# Altium PCB PCB1.PcbDoc
Units mil, origin at the board's own origin, x right, y up, seen from the top; angles counter-clockwise.
Board outline 1610.03 x 1610.03 mil, 2 copper layers (Top Layer, Bottom Layer); 99 components, 70 nets, 276 pads, 102 vias.
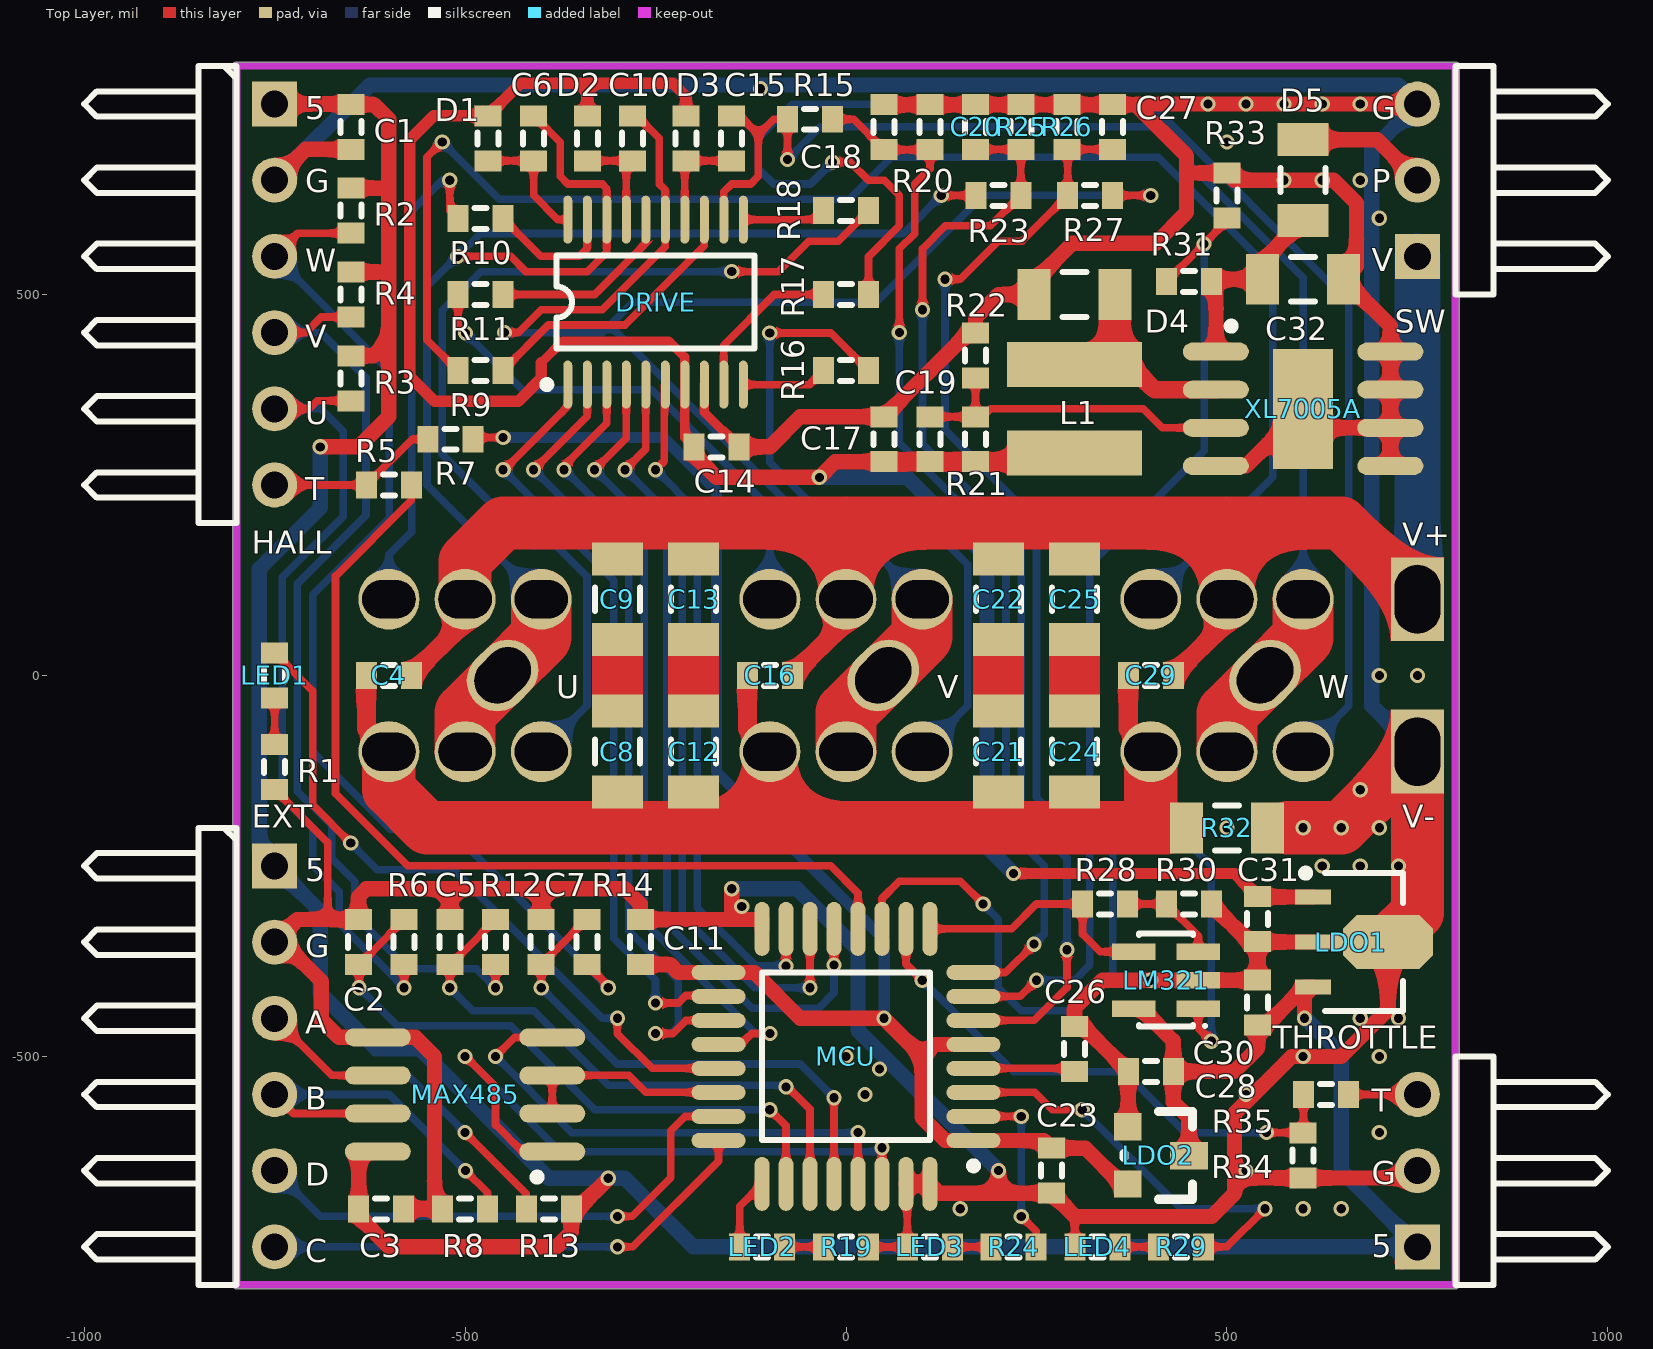
[diagram p0: Top Layer view]
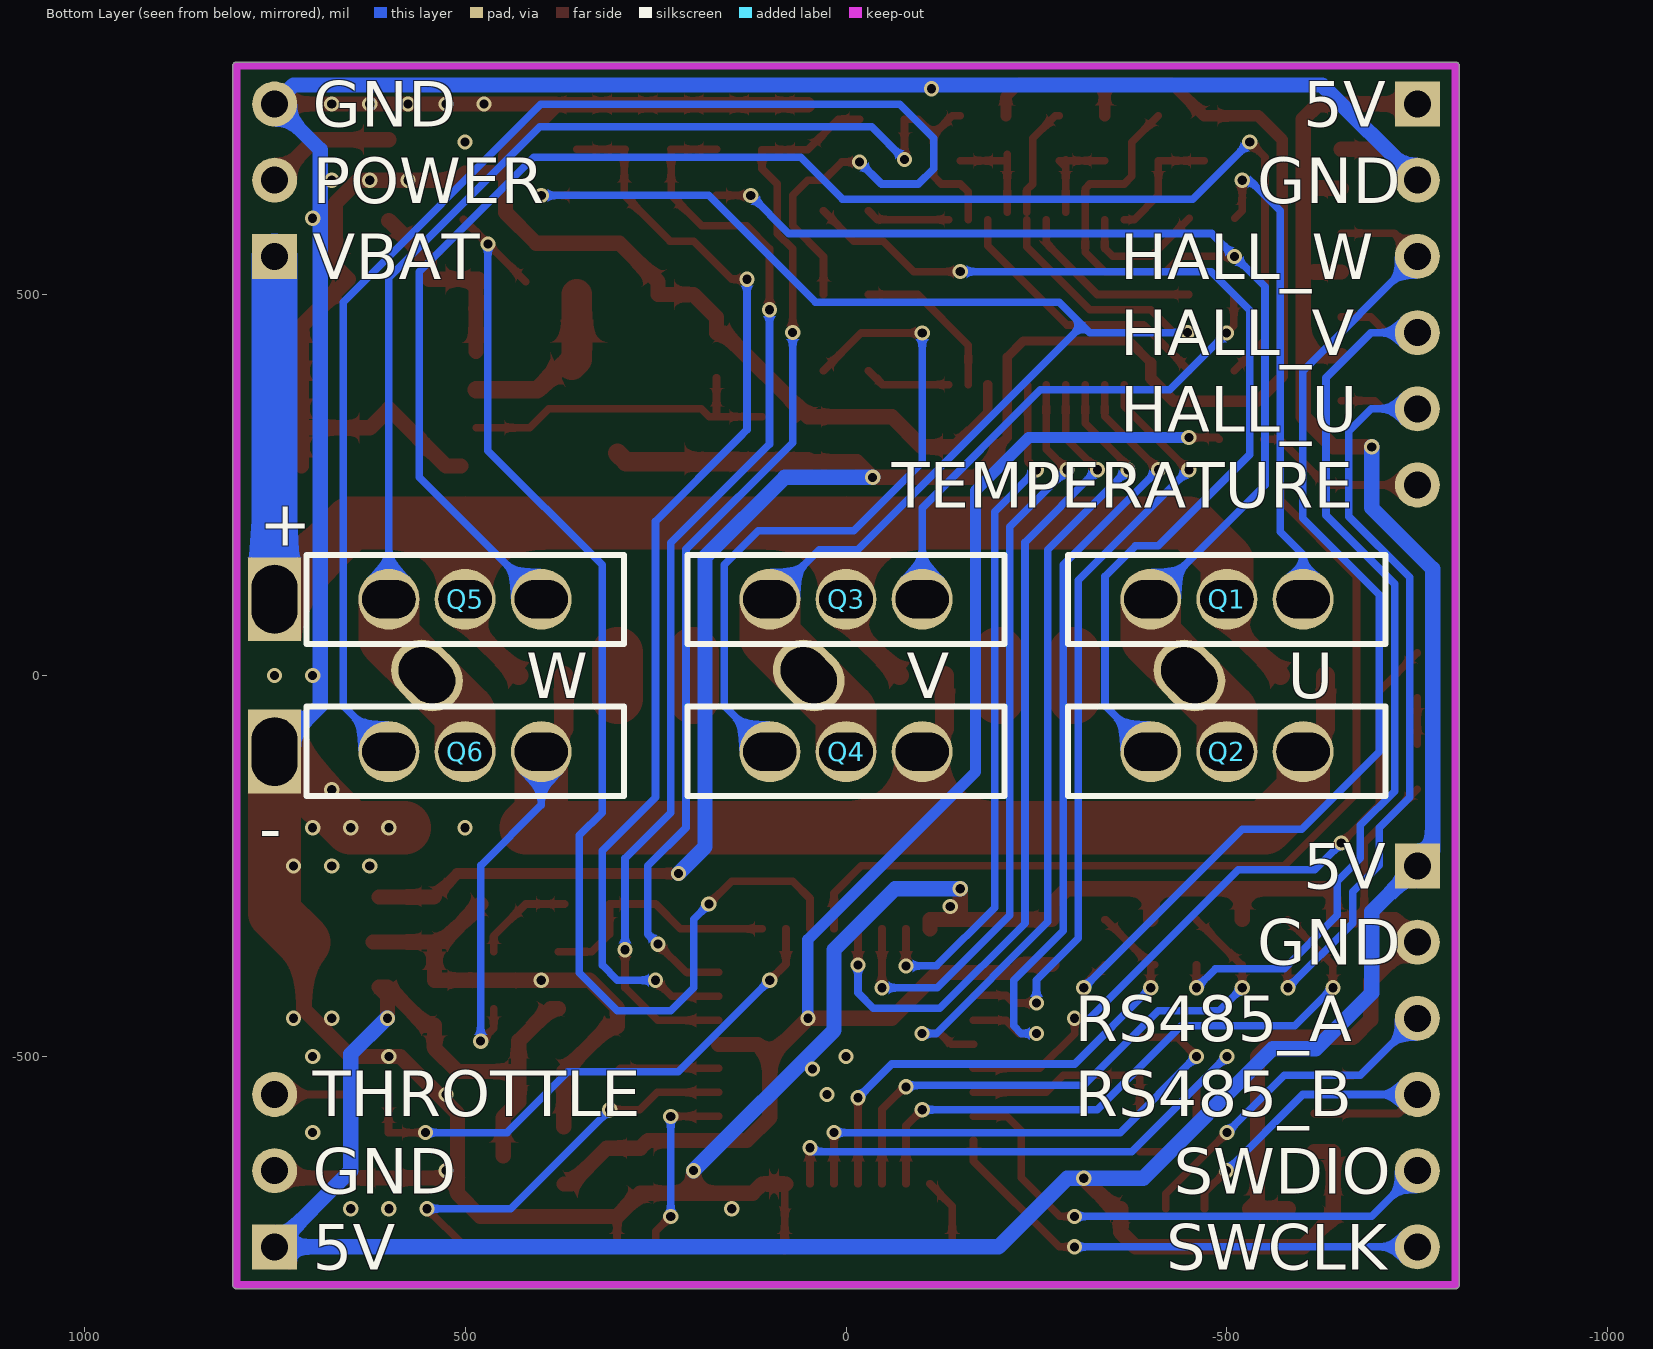
[diagram p1: Bottom Layer view, seen from below]

## Layer stack, top to bottom
Top Solder: solder mask 0.4, Solder Resist, Dk 3.5
Top Layer: signal copper 1.4
Dielectric 1: dielectric 12.6, FR-4, Dk 4.8
Bottom Layer: signal copper 1.4
Bottom Solder: solder mask 0.4, Solder Resist, Dk 3.5

## Board outline
-805.01,-800 ccw(c-800,-800) -800,-805.02 800,-805.02 ccw(c800,-800) 805.01,-800 805.01,800 ccw(c800,800) 800,805.01 -800,805.01 ccw(c-800,800) -805.01,800

## Design rules (kind name [scope] priority, off if disabled: settings)
Clearance [All] p1: gap=10 ignorepadtopadclearanceinfootprint=FALSE except(0: Arc-Hole Track-Hole SMDPad-Hole THPad-Hole Via-Hole Fill-Hole Poly-Hole Region-Hole Text-Hole)
PlaneConnect [All] p1: planeconnectstyle=Direct reliefexpansion=20 reliefentries=4 reliefconductorwidth=10 reliefairgap=10
PolygonConnect [All] p1: connectstyle=Direct reliefconductorwidth=10 reliefentries=4 polygonreliefangle="90 Angle" airgapwidth=10
RoutingVias [All] p1: holewidth=12 width=20 viastyle="Through Hole" minholewidth=12 minwidth=20 maxholewidth=393.7 maxwidth=393.7
SolderMaskExpansion [All] p1: expansion=4
Width [All] p1: maxlimit=100 minlimit=10 preferedwidth=10 minimp=50.000000 maximp=50.000000 favimp=50.000000
29 further rules are at their usual default settings.

## Components (designator, comment, footprint, x,y, rotation, side; value= is the part's Value field where it differs from the comment)
C1 "Cap" 0603 -650,720 r270 top value=1uF (schematic designator C45)
C2 "Cap" 0603 -640,-350 r90 top value=104 (schematic designator C61)
C3 "Cap" 0603 -610,-700 r0 top value=1uF (schematic designator C46)
C4 "Cap" 0603 -600,0 r180 top value=1uF (schematic designator C50)
C5 "Cap" 0603 -520,-350 r90 top value=104 (schematic designator C62)
C6 "Cap" 0603 -410,705 r270 top value=1uF (schematic designator C1)
C7 "Cap" 0603 -400,-350 r90 top value=104 (schematic designator C63)
C8 "Cap" 1206 -300,-100 r270 top value=1uF (schematic designator C57)
C9 "Cap" 1206 -300,100 r270 top value=1uF (schematic designator C58)
C10 "Cap" 0603 -280,705 r270 top value=1uF (schematic designator C2)
C11 "Cap" 0603 -270,-350 r90 top value=0.1uf (schematic designator C16)
C12 "Cap" 1206 -200,-100 r270 top value=1uF (schematic designator C55)
C13 "Cap" 1206 -200,100 r270 top value=1uF (schematic designator C56)
C14 "Cap" 0603 -170,300 r180 top value=1uf (schematic designator C66)
C15 "Cap" 0603 -150,705 r270 top value=1uF (schematic designator C3)
C16 "Cap" 0603 -100,0 r180 top value=1uF (schematic designator C60)
C17 "Cap" 0603 50,310 r90 top value=33nf (schematic designator C11)
C18 "Cap" 0603 50,719.53 r270 top value=10nf (schematic designator C43)
C19 "Cap" 0603 110,310 r90 top value=33nf (schematic designator C13)
C20 "Cap" 0603 170,720 r270 top value=10nf (schematic designator C42)
C21 "Cap" 1206 200,-100 r270 top value=1uF (schematic designator C51)
C22 "Cap" 1206 200,100 r270 top value=1uF (schematic designator C53)
C23 "Cap" 0603 270,-650 r270 top value=0.1uf (schematic designator C17)
C24 "Cap" 1206 300,-100 r270 top value=1uF (schematic designator C52)
C25 "Cap" 1206 300,100 r270 top value=1uF (schematic designator C54)
C26 "Cap" 0603 300,-490 r270 top value=0.1uf (schematic designator C5)
C27 "Cap" 0603 350,720 r270 top value=10nf (schematic designator C41)
C28 "Cap" 0603 400,-520 r180 top value=0.1uf (schematic designator C15)
C29 "Cap" 0603 400,0 r180 top value=1uF (schematic designator C59)
C30 "Cap" 0603 540,-429.53 r90 top value=1uF (schematic designator C40)
C31 "Cap" 0603 540,-319.53 r270 top value=0.1uf (schematic designator C14)
C32 "Cap" 1206 600,520 r0 top value=0.1uf (schematic designator C12)
D1 "Diode" 0603 -470,705 r270 top
D2 "Diode" 0603 -339.57,705 r270 top
D3 "Diode" 0603 -210,705 r270 top
D4 "Diode" 1206 300,500 r0 top
D5 "Fuse 1" 1206 600,650 r90 top (schematic designator D8)
DRIVE "FD6288" TSSOP20 -250,490 r0 top
EXT "Header 6H" HDR1X6H -750,-250 r270 top
HALL "Header 6H" HDR1X6H -750,750 r270 top
L1 "Inductor" CDRH3D16 300,350 r270 top value=47uH
LDO1 "78L05" SOT-89 680,-350 r0 top
LDO2 "XC6206" SOT23 410,-630 r270 top
LED1 "LED0" 0603 -750,0 r270 top (schematic designator LED4)
LED2 "LED0" 0603 -110,-750 r0 top (schematic designator LED3)
LED3 "LED0" 0603 110,-750 r180 top (schematic designator LED1)
LED4 "LED0" 0603 330,-750 r180 top (schematic designator LED2)
LM321 "LM321" SOT23-5 420,-400 r90 top
MAX485 "MAX485" SOIC-8 -500,-550 r180 top
MCU "STM32F030K6Tx" LQFP-32 0,-500 r180 top
Q1 "MOSFET-N" TO220-MIX -500,100 r0 bottom
Q2 "MOSFET-N" TO220-MIX -500,-100 r180 bottom
Q3 "MOSFET-N" TO220-MIX 0,100 r0 bottom
Q4 "MOSFET-N" TO220-MIX 0,-100 r180 bottom
Q5 "MOSFET-N" TO220-MIX 500,100 r0 bottom
Q6 "MOSFET-N" TO220-MIX 500,-100 r180 bottom
R1 "Res1" 0603 -750,-120 r270 top value=1K (schematic designator R92)
R2 "Res1" 0603 -650,610 r270 top value=1K (schematic designator R69)
R3 "Res1" 0603 -650,390 r270 top value=1K (schematic designator R67)
R4 "Res1" 0603 -650,500 r270 top value=1K (schematic designator R68)
R5 "Res1" 0603 -600,250 r0 top value=100 (schematic designator R71)
R6 "Res1" 0603 -580,-350 r90 top value=100 (schematic designator R64)
R7 "Res1" 0603 -519.06,310 r180 top value=1K (schematic designator R70)
R8 "Res1" 0603 -500,-700 r0 top value=20K (schematic designator R81)
R9 "Res1" 0603 -480,400 r0 top value=3R3 (schematic designator R3)
R10 "Res1" 0603 -480,600 r0 top value=3R3 (schematic designator R1)
R11 "Res1" 0603 -479.53,500 r0 top value=3R3 (schematic designator R2)
R12 "Res1" 0603 -460,-350 r90 top value=100 (schematic designator R65)
R13 "Res1" 0603 -390,-700 r180 top value=20K (schematic designator R80)
R14 "Res1" 0603 -340,-350 r90 top value=100 (schematic designator R66)
R15 "Res1" 0603 -47.24,730 r0 top value=56k (schematic designator R28)
R16 "Res1" 0603 0,400 r180 top value=3R3 (schematic designator R8)
R17 "Res1" 0603 0,500 r180 top value=3R3 (schematic designator R9)
R18 "Res1" 0603 0,610 r180 top value=3R3 (schematic designator R7)
R19 "Res1" 0603 0,-750 r0 top value=1K (schematic designator R89)
R20 "Res1" 0603 110.24,719.53 r90 top value=4K7 (schematic designator R29)
R21 "Res1" 0603 170,310 r90 top value=30K (schematic designator R32)
R22 "Res1" 0603 170,420 r90 top value=2.7K (schematic designator R31)
R23 "Res1" 0603 200,630 r0 top value=56k (schematic designator R22)
R24 "Res1" 0603 220,-750 r180 top value=1K (schematic designator R90)
R25 "Res1" 0603 230,720 r90 top value=4K7 (schematic designator R23)
R26 "Res1" 0603 290,720 r90 top value=4K7 (schematic designator R25)
R27 "Res1" 0603 320.47,630 r180 top value=56k (schematic designator R24)
R28 "Res1" 0603 340,-300 r180 top value=100K (schematic designator R27)
R29 "Res1" 0603 440,-750 r180 top value=1K (schematic designator R91)
R30 "Res1" 0603 450,-300 r180 top value=10K (schematic designator R26)
R31 "Res1" 0603 450,516.85 r180 top value=300K (schematic designator R14)
R32 "Res1" 1206 500,-200 r0 top value=0.01 (schematic designator R13)
R33 "Res1" 0603 500,630 r90 top value=10K (schematic designator R15)
R34 "Res1" 0603 600,-630 r270 top value=10K (schematic designator R36)
R35 "Res1" 0603 630,-550 r180 top value=10K
SW "Header 3H" HDR1X3H 750,550 r90 top
THROTTLE "Header 3H" HDR1X3H 750,-750 r90 top
U "TPS50mil" PHASE#1 -450.71,0 r90 top
V "TPS50mil" PHASE#1 48.9,0 r90 top
V+ "TPS50mil" PHASE#2 750,100 r0 top
V- "TPS50mil" PHASE#2 750,-100 r0 top
W "TPS50mil" PHASE#1 550,0 r90 top
XL7005A "XL7005A" SOIC-8P 600,350 r0 top

## Footprints (in the part's own frame and the unit in brackets; to place one, negate y for a bottom-side part, rotate by r counter-clockwise, add the part's x,y. Pads: shape width x height; smd on the part's side, far side on the other; paste and mask are expansions set on the pad)
0603 [mm] "Chip Resistor, Body 1.6x0.8mm, IPC High Density"
  rect 0.7x0.9 smd: 1(-0.75,0) 2(0.75,0)
  silkscreen extent -0.2,-0.35 0.2,0.35, body extent -0.85,-0.48 0.85,0.48, height 0.9
1206 [mm] "Chip Capacitor, Body 3.2x1.6mm, IPC High Density"
  rect 1.1x1.7 smd: 1(-1.35,0) 2(1.35,0)
  silkscreen extent -0.4,-0.75 0.4,0.75, body extent -1.7,-0.9 1.7,0.9, height 1.3
CDRH3D16 [mm] "Molded Inductor, 2-Leads, Body 4.00x4.00mm, IPC Medium Density"
  rect 1.5x4.5 smd: 1(-1.475,0) 2(1.475,0)
  body extent -2,-2 2,2, height 2
HDR1X3H [mm] "Connector; Header; 3 Position; Right Angle"
  rect 1.5x1.5 hole 0.9: 1(0,0)
  round 1.5 hole 0.9: 2(2.54,0) 3(5.08,0)
  silkscreen extent -1.27,-6.35 6.35,-1.27
HDR1X6H [mm] "Connector; Header; 6 Position; Right Angle"
  rect 1.5x1.5 hole 0.9: 1(0,0)
  round 1.5 hole 0.9: 2(2.54,0) 3(5.08,0) 4(7.62,0) 5(10.16,0) 6(12.7,0)
  silkscreen extent -1.27,-6.35 13.97,-1.27
LQFP-32 [mm] "LQFP"
  oval 1.8x0.5 smd: 1(-4.25,2.8) 2(-4.25,2) 3(-4.25,1.2) 4(-4.25,0.4) 5(-4.25,-0.4) 6(-4.25,-1.2) 7(-4.25,-2) 8(-4.25,-2.8) 17(4.25,-2.8) 18(4.25,-2) 19(4.25,-1.2) 20(4.25,-0.4) 21(4.25,0.4) 22(4.25,1.2) 23(4.25,2) 24(4.25,2.8)
  oval 0.5x1.8 smd: 9(-2.8,-4.25) 10(-2,-4.25) 11(-1.2,-4.25) 12(-0.4,-4.25) 13(0.4,-4.25) 14(1.2,-4.25) 15(2,-4.25) 16(2.8,-4.25) 25(2.8,4.25) 26(2,4.25) 27(1.2,4.25) 28(0.4,4.25) 29(-0.4,4.25) 30(-1.2,4.25) 31(-2,4.25) 32(-2.8,4.25)
  silkscreen extent -4.38,-2.79 2.79,3.77, body extent -3.5,-3.5 3.5,3.5, height 1.6
PHASE#1 [mil]
  oval 100x80 hole 60 slot 80 at 135 deg rot 135: 1(0,0)
PHASE#2 [mil]
  rect 70x110 hole 60 slot 90 at 90 deg: 1(0,0)
SOIC-8 [mm]
  oval 2.2x0.6 smd: 1(-2.908,1.905) 2(-2.908,0.635) 3(-2.908,-0.635) 4(-2.908,-1.905) 5(2.908,-1.905) 6(2.908,-0.635) 7(2.908,0.635) 8(2.908,1.905)
  silkscreen extent -2.53,2.63 -2.28,2.88
SOIC-8P [mm]
  oval 2.2x0.6 smd: 1(-2.908,1.905) 2(-2.908,0.635) 3(-2.908,-0.635) 4(-2.908,-1.905) 5(2.908,-1.905) 6(2.908,-0.635) 7(2.908,0.635) 8(2.908,1.905)
  rect 2x4 smd: 9(0,0)
  silkscreen extent -2.52,2.63 -2.27,2.88
SOT23 [mil]
  rect 36x36 smd: 1(-37.5,-40) 3(37.5,-40)
  rect 36x50 smd: 2(0.5,40)
  silkscreen extent -58,-45 58,45
SOT23-5 [mm] "SOT-23/SC-74A; 5 Leads; Body 3.1 x 3 mm, inc. leads (LxW max)"
  rect 0.55x1.45 smd: 1(-0.95,-1.075) 2(0,-1.075) 3(0.95,-1.075) 4(0.95,1.075) 5(-0.95,1.075)
  silkscreen extent -1.57,-1.35 1.55,0.9
SOT-89 [mm] "SOT89, 3-Leads, Body 4.5x2.4 mm, Pitch 1.5mm, Lead Span 4.1mm, IPC High Density"
  rect 1.2x0.5 smd: 1(-1.7,1.5) 3(-1.7,-1.5)
  rect 1.6x0.5 smd: 2(-1.5,0)
  oct 3x1.8 smd: 2(0.8,0)
  silkscreen extent -2.07,-2.3 1.3,2.42, body extent -1.3,-2.3 1.3,2.3, height 1.6
TO220-MIX [mil]
  round 80 hole 50 slot 70 at 0 deg: 1(-100,0) 2(0,0) 3(100,0)
  silkscreen extent -208,-58 208,59
TSSOP20 [mm] "Shrink Small Outline; 20 Leads; Body Width 4.4 mm; Pitch 0.65 mm"
  oval 0.3x1.6 smd: 1(-2.925,-2.75) 2(-2.275,-2.75) 3(-1.625,-2.75) 4(-0.975,-2.75) 5(-0.325,-2.75) 6(0.325,-2.75) 7(0.975,-2.75) 8(1.625,-2.75) 9(2.275,-2.75) 10(2.925,-2.75) 11(2.925,2.75) 12(2.275,2.75) 13(1.625,2.75) 14(0.975,2.75) 15(0.325,2.75) 16(-0.325,2.75) 17(-0.975,2.75) 18(-1.625,2.75) 19(-2.275,2.75) 20(-2.925,2.75)
  silkscreen extent -3.75,-2.87 3.3,1.55, body extent -3.3,-1.91 3.3,1.91, height 1.1

## Part data
C1 C2 C3 C4 C5 C6 C7 C8 C9 C10 C11 C12 C13 C14 C15 C16 C17 C18 C19 C20 C21 C22 C23 C24 C25 C26 C27 C28 C29 C30 C31 C32: "Capacitor", LatestRevisionDate=17-Jul-2002, LatestRevisionNote="Re-released for DXP Platform.", PackageDescription="Radial Cap, Thru-Hole; 2 Leads; 0.3 in Pin Spacing", PackageReference=RAD-0.3, Published=8-Jun-2000, Publisher="Altium Limited"
D1 D2 D3 D4: "Default Diode", Code_JEDEC=DO-214-AB, LatestRevisionDate=17-Jul-2002, LatestRevisionNote="Re-released for DXP Platform.", PackageDescription="DO-214-AB/SMC; 2 C-Bend Leads; Body 7.9 x 5.9 mm, inc. leads (LxW)", PackageReference=SMC, PackageVersion=Sep-1996, Published=8-Jun-2000, Publisher="Altium Limited"
D5: "Fuse", LatestRevisionDate=17-Jul-2002, LatestRevisionNote="Re-released for DXP Platform.", PackageDescription="Thru-Hole; 2 Leads", PackageReference=PIN-W2/E2.8, Published=8-Jun-2000, Publisher="Altium Limited"
EXT HALL: "Header, 6-Pin, Right Angle", LatestRevisionDate=17-Jul-2002, LatestRevisionNote="Re-released for DXP Platform.", Publisher="Altium Limited"
LDO2: library part HT75xx
LED1 LED2 LED3 LED4: "Typical INFRARED GaAs LED", LatestRevisionDate=08-Jul-2005, LatestRevisionNote="Mech Layer 1 removed.", PackageDescription="LED; 2 Leads", PackageReference=LED-0, Published=8-Jun-2000, Publisher="Altium Limited"
MAX485: library part SP3485
Q1 Q2 Q3 Q4 Q5 Q6: "N-Channel MOSFET", LatestRevisionDate=17-Jul-2002, LatestRevisionNote="Re-released for DXP Platform.", PackageDescription="TO, Flat Index; 3 In-Line, Axial Leads; Body Dia. 4.6mm; Lead Dia. 0.5 mm (max)", PackageReference=E3, PackageVersion=1995/1996, Published=8-Jun-2000, Publisher="Altium Limited"
R1 R2 R3 R4 R5 R6 R7 R8 R9 R10 R11 R12 R13 R14 R15 R16 R17 R18 R19 R20 R21 R22 R23 R24 R25 R26 R27 R28 R29 R30 R31 R32 R33 R34 R35: "Resistor", LatestRevisionDate=17-Jul-2002, LatestRevisionNote="Re-released for DXP Platform.", PackageDescription="Axial Device, Thru-Hole; 2 Leads; 0.3 in Pin Spacing", PackageReference=AXIAL-0.3, Published=8-Jun-2000, Publisher="Altium Limited"
SW THROTTLE: "Header, 3-Pin, Right Angle", LatestRevisionDate=17-Jul-2002, LatestRevisionNote="Re-released for DXP Platform.", Publisher="Altium Limited"
U V V+ V- W: "Test Point, 12x25mil, Not Populated"
L1: Code_IEC=1005, Code_JEITA=0402, LatestRevisionDate=29-May-2009, LatestRevisionNote="IPC-7351 Footprint Added.", PackageDescription="Chip Inductor", PackageReference=0402-A, Published=8-Jun-2000, Publisher="Altium Limited"

## Via types
v1: diameter 20, hole 12, Top Layer to Bottom Layer, tented both sides, 102 vias

## Nets (pads, with @x,y where several pads share a name; then routed paths per layer and width w, separated by ;. In a path a pad name is that pad's centre, name@x,y a point inside that pad or via, vN(x,y) a via of type N, cw(c..) or ccw(c..) an arc to the next point about the centre after c; other vN are vias at no path point)
+3V3: C11.1 C23.1 LDO2.3 MCU.1 MCU.5 MCU.17 R7.1 | length 2012.9
  Top Layer w10: R7.1 -487.25,312.28 v1(-450,312.28)
  Top Layer w20: C11.1 -230.47,-379.53 -220.24,-389.76 MCU.17 -120.24,-389.76 -60,-450 v1(50,-450) 100,-500 ; MCU.5 115.75,-484.25 100,-500 ; LDO2.3 361.04,-667.5 314.02,-620.47 C23.1 259.76,-610.24 MCU.1 130.24,-610.24 100,-580 100,-500
  Bottom Layer w15: v1(-450,312.28) -240,312.28 -170,242.28 -170,-126.57 50,-346.57 v1(50,-450)
+5: C1.1 C3.1 C28.1 C30.1 EXT.1 HALL.1 LDO1.3 LDO2.2 LM321.5 MAX485.8 R2.1 R3.1 R4.1 R13.1 THROTTLE.1 | length 4595.9
  Top Layer w20: HALL.1 -650.47,750 C1.1 -619.53,749.53 -600,730 -600,640 ; v1(-690,300) -640,300 -600,340 -600,439.53 ; R3.1 -620,419.53 -600,439.53 ; R4.1 -600.47,529.53 -600,530 ; R2.1 -600.47,639.53 -600,640 ; MAX485.8 -639.06,-625 -639.53,-625.47 C3.1 -639.53,-710.47 -600,-750 -380,-750 -360.47,-730.47 R13.1 -351.97,-700 v1(-311.97,-660) ; LM321.5 387.4,-437.4 429.53,-479.53 C28.1 ; LDO2.2 450,-580.47 429.53,-560 C28.1 ; v1(601.89,-450) 601.89,-420.24 LDO1.3 601.89,-409.06 551.89,-459.06 C30.1 540,-489.53 509.53,-520 C28.1 ; THROTTLE.1@730,-770 THROTTLE.1 ; -600,439.53 -600,530 ; -600,530 -600,640
  Bottom Layer w20: v1(-690,300) -690,220 -770,140 -770,-230 EXT.1 -690,-310 -690,-416.69 -616.69,-490 -560,-490 -390,-660 v1(-311.97,-660) -290,-660 -200,-750 THROTTLE.1 650,-650 650,-496.93 603.07,-450 v1(601.89,-450)
+15: C14.2 C17.1 C19.1 C31.1 D1.1 D2.1 D3.1 DRIVE.7 L1.2 LDO1.1 R21.1 | length 2964.7
  Top Layer w12: -400,410.47 -371.47,439 -232.88,439 -211.61,417.74 DRIVE.7 -211.61,312.09 C14.2
  Top Layer w15: -400,410.47 -400,390 -430,360 -540,360 -572.5,392.5 -572.5,702.97 -540.94,734.53 D1.1 -427.03,777.5 -339.57,777.5 ; D2.1 -339.57,777.5 ; D3.1 -210,760 -227.5,777.5 -339.57,777.5 ; v1(220,-260) 510,-260 C31.1
  Top Layer w20: C14.2 -199.53,289.53 -170,260 v1(-35,260) -14.53,280.47 C17.1 ; C31.1 540.95,-290.94 LDO1.1
  Top Layer w25: C17.1 C19.1 R21.1 288.54,280.47 L1.2
  Bottom Layer w20: v1(-35,260) 80.36,260 185,155.36 185,-225 v1(220,-260)
+48: C32.1 D5.1 R31.1 XL7005A.1 | length 261.8
  Top Layer w20: XL7005A.1 485.51,510.87 R31.1 482.68,520 C32.1 546.85,543.7 D5.1
BAT_VOL: MCU.11 R31.2 R33.1 | length 1642.3
  Top Layer w10: MCU.11 47.24,-292.76 70,-270 150,-270 v1(180,-300) ; R31.2 v1(470,566.38) R33.1@502.05,598.43
  Bottom Layer w10: v1(180,-300) 200,-320 200,-410 230,-440 300,-440 350,-390 350,-210 320,-180 320,145 470,295 v1(470,566.38)
GND: C1.2 C2.2 C3.2 C5.2 C7.2 C11.2 C14.1 C17.2 C18.1 C20.1 C23.2 C26.1 C27.1 C28.2 C30.2 C31.2 C32.2 D4.1 DRIVE.8 EXT.2 HALL.2 LDO1.2 LDO2.1 LED3.2 LED4.2 LM321.2 MAX485.5 MCU.16 MCU.31 MCU.32 R1.2 R8.1 R19.2 R20.2 R22.2 R25.2 R26.2 R30.1 R32.2 R33.2 R34.2 SW.3 THROTTLE.2 V-.1 XL7005A.4 XL7005A.5 XL7005A.6 XL7005A.7 XL7005A.8 XL7005A.9 | length 9821.6
  Top Layer w10: R1.2 -680.24,-219.29 -680.24,-320.47 ; R19.2 LED3.2 80.47,-669.06 MCU.31 ; LED4.2 300.47,-710
  Top Layer w12: DRIVE.8 -186.02,345.55 C14.1
  Top Layer w20: HALL.2 -709.53,690.47 C1.2 ; C3.2 R8.1 -540,-689.53 -540,-500 -565,-475 MAX485.5 -665.47,-475 -688.58,-451.89 -688.58,-401.42 -740,-350 EXT.2 -720.47,-320.47 -680.24,-320.47 C2.2 -640,-290.47 -629.53,-280 -520,-280 ; C5.2 -520,-280 ; C7.2 -400,-280 ; v1(-150,-280) -150,-320.47 ; C14.1 -100,300 -60.47,339.53 C17.2 160,449.53 R22.2 170,470 200,500 D4.1 246.85,516.85 297.2,567.2 406.5,567.2 446.85,607.56 446.85,660 ; MCU.16 -110.24,-320.47 -150,-320.47 ; C18.1 R20.2 380,749.06 ; MCU.31 MCU.32 122.44,-679.53 200,-679.53 ; v1(200,-650) 200,-679.53 ; LDO2.1@370.47,-592.5 C28.2 310.94,-460.47 C26.1 300,-436.69 336.69,-400 LM321.2 C30.2 C31.2 ; R30.1 528.58,-349.06 C31.2 ; XL7005A.4@505.31,275 525,275 XL7005A.9 625,325 XL7005A.6 ; LDO1.2@620.94,-350 540.95,-350 C31.2 ; LDO1.2@711.5,-350 711.5,-438.5 650,-500 585,-500 510,-575 510,-659.53 ; XL7005A.5 XL7005A.6 ; THROTTLE.2 740.47,-659.53 R34.2 510,-659.53 ; SW.3 380.94,750 380,749.06 ; -520,-280 -400,-280 ; -400,-280 -290,-280 -270,-300 C11.2 -150,-320.47 ; 200,-679.53 C23.2 300.47,-710 480,-710 510,-680 510,-659.53 ; 380,749.06 446.85,682.2 446.85,660 ; 446.85,660 447.32,659.53 R33.2 509.53,650 640,650 670,620 670,536.85 C32.2 714.49,458.66 XL7005A.8 XL7005A.7 XL7005A.6
  Top Layer w70: 580,-200 v1(650,-200) V-.1 750,-311.5 LDO1.2@711.5,-350
  Bottom Layer w20: HALL.2 -625,775 725,775 SW.3 690,690 690,-40 V-.1 ; v1(-150,-280) -64.25,-280 15.75,-360 15.75,-465.75 v1(200,-650)
  other v1: 150,-700 600,-700 650,-700 525,-650 700,-600 25,-550 525,-550 43.92,-516.49 0,-500 600,-500 700,-500 675,-450 725,-450 400,-400 -136.8,-303.27 625,-250 675,-250 725,-250 500,-200 600,-200 700,-200 675,-150 700,0 750,0 700,600 575,650 625,650 675,650 500,700 475,750 525,750 575,750 625,750 675,750 -112.16,770
HALL_U: C2.1 MCU.26 R6.2 | length 826.8
  Top Layer w10: v1(-639.06,-410) -639.06,-380.47 C2.1 -639.06,-379.53 R6.2 ; v1(-100,-570) -78.74,-591.26 MCU.26
  Bottom Layer w10: v1(-639.06,-410) -589.06,-460 -440,-460 -330,-570 v1(-100,-570)
HALL_U_IN: HALL.5 R3.2 R6.1 | length 1067.1
  Top Layer w10: HALL.5 -704.61,350 -694.13,360.47 R3.2 ; v1(-580,-410) R6.1
  Bottom Layer w10: HALL.5 -689.29,350 -660,320.71 -660,208.62 -740,128.62 -740,-160 -700,-200 -700,-249.06 -665,-284.06 -665,-325 v1(-580,-410)
HALL_V: C5.1 MCU.27 R12.2 | length 752.7
  Top Layer w10: v1(-520,-410) C5.1 -519.06,-379.53 R12.2 ; v1(-78.74,-540) -76.77,-540 -47.24,-569.53 MCU.27
  Bottom Layer w10: v1(-520,-410) -490,-440 -410,-440 -311.97,-538.03 -78.74,-538.03 v1(-78.74,-540)
HALL_V_IN: HALL.4 R4.2 R12.1 | length 1282.1
  Top Layer w10: HALL.4 -709.05,450 -688.58,470.47 R4.2 ; v1(-460,-410) R12.1
  Bottom Layer w10: HALL.4 -689.06,450 -630,390.94 -630,210 -720,120 -720,-151.72 -675,-196.72 -675,-240 -645,-270 -645,-315 -575,-385 -485,-385 v1(-460,-410)
HALL_W: C7.1 MCU.28 R14.2 | length 673
  Top Layer w10: C7.1@-405,-379.53 C7.1@-404.06,-379.53 ; v1(-400,-410) C7.1 -340.95,-320.47 R14.2 ; MCU.28 v1(-15.75,-554.25)
  Bottom Layer w10: v1(-400,-410) -300,-510 -60,-510 v1(-15.75,-554.25)
HALL_W_IN: HALL.3 R2.2 R14.1 | length 1425.1
  Top Layer w10: HALL.3 -719.53,580.47 R2.2 ; R14.1 -311.97,-407.56 v1(-311.97,-410)
  Bottom Layer w10: HALL.3 -599.53,399.53 -599.53,206.18 -700,105.71 -700,-100 -598.28,-201.72 -520.25,-201.72 v1(-311.97,-410)
HI_U: DRIVE.1 MCU.18 | length 1018.1
  Top Layer w10: v1(-450,270) -448.28,270 -365.16,353.13 DRIVE.1 ; v1(-250,-430) -220,-430 -210,-420 -168.58,-420 MCU.18
  Bottom Layer w10: v1(-450,270) -305,125 -305,-345 -250,-400 v1(-250,-430)
HI_V: DRIVE.2 MCU.19 | length 1073.6
  Top Layer w10: v1(-410,270) -339.57,340.43 DRIVE.2 ; v1(-250,-470) -227.2,-470 -209.96,-452.76 MCU.19
  Bottom Layer w10: v1(-410,270) -285,145 -285,-335 -220,-400 -220,-460 -230,-470 v1(-250,-470)
HI_W: DRIVE.3 MCU.20 | length 1071.2
  Top Layer w10: v1(-370,270) -370,275 -313.98,331.02 DRIVE.3 ; MCU.20 -138.1,-484.25 -123.84,-470 v1(-99.78,-470)
  Bottom Layer w10: v1(-370,270) -265,165 -265,-323.28 -118.28,-470 v1(-99.78,-470)
HO1: DRIVE.19 R10.2 | length 173.8
  Top Layer w10: R10.2 -400.47,550 -350,550 -339.57,560.43 DRIVE.19
HO2: DRIVE.16 R11.2 | length 246.1
  Top Layer w10: R11.2 -330,500 -262.8,567.2 DRIVE.16
HO3: DRIVE.13 R9.2 | length 366.7
  Top Layer w10: R9.2 -390.47,460 -290,460 -186.02,563.98 DRIVE.13
LED1: MCU.2 R24.1 | length 242
  Top Layer w10: MCU.2 v1(230,-578.74) ; v1(230,-710) 249.53,-729.53 R24.1
  Bottom Layer w10: v1(230,-710) v1(230,-578.74)
LED2: MCU.3 R29.1 | length 547.1
  Top Layer w10: MCU.3 247.72,-547.24 270.47,-570 v1(310,-570) ; R29.1 500,-750 v1(550,-700)
  Bottom Layer w10: v1(310,-570) 440,-700 v1(550,-700)
LED3: LED2.1 MCU.25 | length 94.8
  Top Layer w10: LED2.1 -139.53,-696.61 MCU.25
LI_U: DRIVE.4 MCU.13 | length 1121.4
  Top Layer w10: v1(-330,270) -288.39,311.61 DRIVE.4 ; v1(-15.75,-380) MCU.13
  Bottom Layer w10: v1(-330,270) -235,175 -235,-325 -123,-437 -36.06,-437 -15.75,-416.69 v1(-15.75,-380)
LI_V: DRIVE.5 MCU.14 | length 1023.5
  Top Layer w10: v1(-290,270) -262.8,297.2 DRIVE.5 ; v1(-47.24,-410) MCU.14
  Bottom Layer w10: v1(-290,270) -215,195 -215,-315 -120,-410 v1(-47.24,-410)
LI_W: DRIVE.6 MCU.15 | length 911.2
  Top Layer w10: v1(-250,270) -238.31,281.69 -238.31,380.63 DRIVE.6 ; v1(-78.74,-381.26) MCU.15
  Bottom Layer w10: v1(-250,270) -195,215 -195,-305 -118.74,-381.26 v1(-78.74,-381.26)
LO1: DRIVE.11 R18.2 | length 110.2
  Top Layer w10: DRIVE.11 -41.26,598.27 R18.2
LO2: DRIVE.10 R16.2 | length 112.9
  Top Layer w10: DRIVE.10 -47.8,381.73 R16.2
LO3: DRIVE.9 R17.2 | length 210.3
  Top Layer w10: DRIVE.9 -160.43,433.62 -94.06,500 R17.2
MOTOR_CUR: LM321.4 MCU.9 R28.2 | length 330.1
  Top Layer w10: MCU.9 217.32,-332.68 250,-300 R28.2 310.47,-339.53 333.54,-362.6 LM321.4
MOTOR_CUR_RAW: C4.2 C8.2 C12.2 C16.2 C21.2 C24.2 C29.2 LM321.1 Q2.3 Q4.3 Q6.3 R32.1 | length 2099
  Top Layer w10: LM321.1 462.32,-462.8 v1(479.53,-480)
  Top Layer w25: C4.2 -629.53,-70.47 Q2.3 ; C16.2 -129.53,-70.47 Q4.3 ; C29.2 370.47,-70.47 Q6.3
  Top Layer w66.93: -200,-200 -199.53,-199.53
  Top Layer w70: Q2.3 -600,-150 -550,-200 -200,-200 -100,-200 ; Q4.3 -100,-200 ; Q6.3 400,-180 420,-200 -100,-200
  Bottom Layer w10: Q6.3 400,-170 479.53,-249.53 v1(479.53,-480)
MOTOR_TEMP: MCU.12 R5.2 | length 1233.1
  Top Layer w10: R5.2 -570.47,230 -670,130.47 -670,-155 -575,-250 -20,-250 15.75,-285.75 MCU.12
MOTOR_TEMP_RAW: HALL.6 R5.1 R7.2 | length 226.3
  Top Layer w10: HALL.6 R5.1 -569.53,310 R7.2
NetC8_1: C8.1 C9.2 | length 60
  Top Layer w66.93: C8.1@-300,-30 C9.2@-300,30
NetC12_1: C12.1 C13.2 | length 60
  Top Layer w66.93: C12.1@-200,-30 C13.2@-200,30
NetC19_2: C19.2 R21.2 R22.1 XL7005A.3 | length 441.1
  Top Layer w10: C19.2 R21.2 ; R22.1 R21.2 ; XL7005A.3 415,325 390,350 190,350 179.53,339.53 R21.2
NetC21_1: C21.1 C22.2 | length 60
  Top Layer w66.93: C21.1@200,-30 C22.2@200,30
NetC24_1: C24.1 C25.2 | length 60
  Top Layer w66.93: C24.1@300,-30 C25.2@300,30
NetC26_2: C26.2 MCU.4 | length 134.2
  Top Layer w10: MCU.4 296.22,-515.75 C26.2
NetD4_2: D4.2 L1.1 XL7005A.2 | length 234
  Top Layer w23: L1.1@360,408.07 371.93,408.07 405,375 XL7005A.2
  Top Layer w40: D4.2 353.15,414.92 L1.1@360,408.07
NetD5_2: D5.2 SW.2 | length 172
  Top Layer w20: D5.2 696.85,703.15 SW.2
NetLED1_2: LED1.2 R1.1 | length 60.9
  Top Layer w10: R1.1 LED1.2
NetLED2_2: LED2.2 R19.1 | length 50.9
  Top Layer w10: LED2.2 R19.1
NetLED3_1: LED3.1 R24.2 | length 50.9
  Top Layer w10: LED3.1 R24.2
NetLED4_1: LED4.1 R29.2 | length 50.9
  Top Layer w10: LED4.1 R29.2
NetLM321_3: LM321.3 R28.1 R30.2 | length 130.9
  Top Layer w10: R28.1 R30.2 462.32,-341.85 LM321.3
NetQ1_2: Q1.1 R10.1 | length 643.1
  Top Layer w10: v1(-520,650) -520,610 R10.1@-510,600
  Bottom Layer w10: Q1.1 -600,158.62 -570,188.62 -570,610 -530,650 v1(-520,650)
NetQ2_2: Q2.1 R18.1 | length 1314.2
  Top Layer w10: v1(-150,530) -88.74,530 -48.74,570 -10.47,570 R18.1
  Bottom Layer w10: Q2.1 -340,-40 -340,130 -380,170 -410,170 -530,290 -530,479.53 -479.53,530 v1(-150,530)
NetQ3_2: Q3.1 R11.1 | length 668.9
  Top Layer w10: R11.1 -509.05,459.05 v1(-499.53,449.53)
  Bottom Layer w10: v1(-499.53,449.53) -425,375 -255.25,375 -100,219.75 Q3.1
NetQ4_2: Q4.1 R16.1 | length 905.3
  Top Layer w10: v1(-100,449.53) -20,449.53 R16.1
  Bottom Layer w10: v1(-100,449.53) -100,280 -10,190 115,190 160,145 160,-40 Q4.1
NetQ5_2: Q5.1 R9.1 | length 2027.3
  Top Layer w10: v1(-530,700) -550,680 -550,440.47 R9.1
  Bottom Layer w10: v1(-530,700) -455,625 4.53,625 59.53,680 410,680 560,530 560,260 Q5.1
NetQ6_2: Q6.1 R17.1 | length 1926
  Top Layer w10: v1(-17.72,673.86) 5.67,673.86 29.53,650 50,650 70,630 70,590 29.53,549.53 R17.1
  Bottom Layer w10: v1(-17.72,673.86) -46.57,645 -95,645 -115,665 -115,705 -70.47,749.53 400.47,749.53 660,490 660,-40 Q6.1
PHASE_U: C6.1 DRIVE.18 Q1.3 Q2.2 R23.1 U.1 | length 1943.7
  Top Layer w10: v1(-510,550) -440,550 -420,530 -339.57,530 -313.98,555.59 DRIVE.18 -313.98,638.98 -320,645 -365,645 -375,655 -375,699.53 C6.1 ; v1(125,630) R23.1
  Top Layer w80: Q2.2 -500,-49.29 U.1 -400,50.71 Q1.3
  Bottom Layer w10: Q1.3 -550,250 -550,510 v1(-510,550) -480,580 75,580 v1(125,630)
PHASE_V: C10.1 DRIVE.15 Q3.3 Q4.2 R27.1 V.1 | length 2214
  Top Layer w10: v1(-448.28,450) -430,450 -400,480 -320,480 -237.2,562.8 DRIVE.15 ; C10.1 -274.53,734.53 -245,705 -245,645 -237.2,637.2 DRIVE.15@-237.2,608.27 ; R27.1 v1(400,630)
  Top Layer w80: Q4.2 0,-48.9 V.1 100,51.1 Q3.3
  Bottom Layer w10: v1(-448.28,450) -320,450 -310.24,459.76 ; Q3.3 35,165 -15.47,165 -310.24,459.76 ; v1(400,630) 180,630 40,490 -280,490 -310.24,459.76
PHASE_W: C15.1 DRIVE.12 Q5.3 Q6.2 R15.1 W.1 | length 1729.6
  Top Layer w10: DRIVE.12 -160.43,634.57 -150,645 -125,645 -115,655 -115,710 ; C15.1 -139.53,734.53 -115,710 ; v1(-76.77,677.09) R15.1 -95,730 -115,710
  Top Layer w80: Q6.2 500,-50 W.1 600,50 Q5.3
  Bottom Layer w10: v1(-76.77,677.09) -33.86,720 401.72,720 600,521.72 Q5.3
RS485_A: EXT.3 MAX485.6 R13.2 | length 612
  Top Layer w10: EXT.3 -675,-525 MAX485.6 ; v1(-500,-600) -419.53,-680.47 R13.2
  Bottom Layer w10: EXT.3 -675,-525 -575,-525 v1(-500,-600)
RS485_B: EXT.4 MAX485.7 R8.2 | length 499.8
  Top Layer w10: EXT.4 -725,-575 MAX485.7 ; v1(-499.53,-650) -470.47,-679.06 R8.2
  Bottom Layer w10: EXT.4 -599.53,-550 v1(-499.53,-650)
SENS_U: C20.2 MCU.6 R23.2 R25.1 | length 1467.6
  Top Layer w10: v1(100.47,480) 100.47,560 130.47,590 189.53,590 R23.2 229.53,690 R25.1 C20.2 ; MCU.6 247.24,-452.76 290,-410 v1(290,-360)
  Bottom Layer w10: v1(100.47,480) 100.47,303.52 230,173.99 230,-180 290,-240 v1(290,-360)
SENS_V: C27.2 MCU.7 R26.1 R27.2 | length 1479
  Top Layer w10: v1(130,520) 150,520 200,570 230.94,570 R27.2 290.94,689.53 R26.1 C27.2 C27.2@353.15,690.47 ; MCU.7 228.74,-421.26 v1(250,-400)
  Bottom Layer w10: v1(130,520) 130,322.28 140,312.28 250,202.28 250,-160 320,-230 320,-380 300,-400 v1(250,-400)
SENS_W: C18.2 MCU.8 R15.2 R20.1 | length 1382.9
  Top Layer w10: R15.2 10,730 C18.2 R20.1 110.24,665.24 90,645 90,580 70,560 v1(70,450) ; MCU.8 209.76,-389.76 v1(246.85,-352.68)
  Bottom Layer w10: v1(70,450) 70,305.71 210,165.71 210,-200 260,-250 260,-339.53 v1(246.85,-352.68)
SWCLK: EXT.6 MCU.24 | length 656.4
  Top Layer w10: v1(-300,-750) -280,-750 -167.32,-637.32 MCU.24
  Bottom Layer w10: EXT.6 v1(-300,-750)
SWDIO: EXT.5 MCU.23 | length 713.7
  Top Layer w10: v1(-300,-710) -280.47,-710 -230,-659.53 -230,-597.52 -211.22,-578.74 MCU.23
  Bottom Layer w10: EXT.5 -690,-710 v1(-300,-710) ; v1(-300,-710) -300,-705.47 -295.47,-710 v1(-300,-710)
SYS_LED: LED1.1 MCU.21 | length 908.9
  Top Layer w10: LED1.1 -700,-20.47 -700,-170 v1(-650,-220) ; v1(-300,-450) -300,-470 -254.25,-515.75 MCU.21 MCU.21@-166.57,-515
  Bottom Layer w10: v1(-650,-220) -615,-255 -515,-255 -320,-450 v1(-300,-450)
THROTTLE: MCU.10 R34.1 R35.2 | length 709.4
  Top Layer w10: MCU.10 78.74,-378.74 v1(100,-400) ; v1(551.89,-600) 600.47,-600 R35.2
  Bottom Layer w10: v1(100,-400) 220,-520 365,-520 445,-600 v1(551.89,-600)
THROTTLE_RAW: R35.1 THROTTLE.3 | length 90.5
  Top Layer w10: R35.1 THROTTLE.3
UART_DE: MAX485.2 MAX485.3 MCU.22 | length 277.4
  Top Layer w10: MAX485.2 MAX485.3 -285,-525 -262.76,-547.24 MCU.22
UART_RX: MAX485.1 MCU.30 | length 844
  Top Layer w10: v1(-500,-500) -460,-540 -460,-590 -425,-625 MAX485.1 ; MCU.30 v1(47.24,-620)
  Bottom Layer w10: v1(-500,-500) -375,-625 42.24,-625 v1(47.24,-620)
UART_TX: MAX485.4 MCU.29 | length 669.3
  Top Layer w10: v1(-460,-500) -435,-475 MAX485.4 ; MCU.29 v1(15.75,-600)
  Bottom Layer w10: v1(-460,-500) -360,-600 v1(15.75,-600)
VB1: C6.2 D1.2 DRIVE.20 | length 163.5
  Top Layer w10: D1.2 C6.2 -410,630 -378.27,598.27 DRIVE.20
VB2: C10.2 D2.2 DRIVE.17 | length 140.2
  Top Layer w10: D2.2 C10.2@-288.39,675.47 ; DRIVE.17@-288.39,608.27 C10.2@-288.39,667.09 ; C10.2@-288.39,677.09 C10.2@-288.39,675.47 ; C10.2@-288.39,667.09 C10.2 C10.2@-288.39,675.47 ; C10.2@-288.39,667.09 C10.2@-288.39,675.47
VB3: C15.2 D3.2 DRIVE.14 | length 137.9
  Top Layer w10: DRIVE.14@-211.61,608.27 D3.2@-211.61,673.86 ; D3.2@-211.61,683.86 D3.2@-211.61,673.86 ; C15.2 D3.2 D3.2@-211.61,673.86
VBAT: C4.1 C9.1 C13.1 C16.1 C22.1 C25.1 C29.1 Q1.2 Q3.2 Q5.2 SW.1 V+.1 | length 2399.7
  Top Layer w25: C4.1 -500,70.47 Q1.2 ; C16.1 0,70.47 Q3.2 ; C29.1 500,70.47 Q5.2
  Top Layer w70: Q1.2 -500,150 -450,200 0,200 ; Q3.2 0,200 ; Q5.2 500,200 ; V+.1 650,200 500,200 ; 0,200 500,200
  Bottom Layer w60: V+.1 SW.1

## Keep-outs
Keep-Out Layer:
  lines w10: -800,-800 -800,800 800,800 800,-800 -800,-800

## Silkscreen, mask and mechanical layers (free items; w line width, h text height)
Top Overlay:
  text "5" at -710,730 h30
  text "G" at 690,730 h30
  text "G" at -710,634.25 h30
  text "P" at 690,634.25 h30
  text "V" at 690,530.63 h30
  text "W" at -710,530 h30
  text "V" at -710,430 h30
  text "U" at -710,330 h30
  text "T" at -710,230 h30
  text "5" at -710,-270 h30
  text "G" at -710,-370 h30
  text "A" at -710,-470 h30
  text "B" at -710,-570 h30
  text "T" at 690,-572.5 h30
  text "G" at 690,-667.5 h30
  text "D" at -710,-670 h30
  text "5" at 690,-763.78 h30
  text "C" at -710,-770 h30
Bottom Overlay:
  text "5V" at -600,720 h60
  text "GND" at 700,720 h60
  text "GND" at -540,620 h60
  text "POWER" at 700,620 h60
  text "HALL_W" at -360,520 h60
  text "VBAT" at 700,520 h60
  text "HALL_V" at -360,420 h60
  text "HALL_U" at -360,320 h60
  text "TEMPERATURE" at -60,220 h60
  text "+" at 770,170 h60
  text "U" at -580,-30 h60
  text "V" at -80,-30 h60
  text "W" at 420,-30 h60
  text "-" at 770,-230 h60
  text "5V" at -600,-280 h60
  text "GND" at -540,-380 h60
  text "RS485_A" at -300,-480 h60
  text "RS485_B" at -300,-578.74 h60
  text "THROTTLE" at 700,-578.74 h60
  text "SWDIO" at -430,-680 h60
  text "GND" at 700,-680 h60
  text "SWCLK" at -420,-780 h60
  text "5V" at 700,-780 h60
Top Solder:
  lines w50: -600,-100 -600,-150 -550,-200 440,-200 ; -500,-100 -500,-49.29 -400,50.71 -400,100 ; -500,100 -500,150 -450,200 650,200 750,100 ; -100,-200 -100,-100 ; 0,-100 0,-48.9 48.9,0 100,51.1 100,100 ; 0,100 0,200 ; 400,-200 400,-100 ; 500,-100 500,-50 550,0 600,50 600,100 ; 500,100 500,200 ; 570,-200 650,-200 750,-100